# Altium PCB Intelligent_Agriculture.PcbDoc (part 2 of 5)
Units mm, origin at the board's own origin, x right, y up, seen from the top; angles counter-clockwise.
Board outline 99.69 x 99.69 mm, 2 copper layers (Top Layer, Bottom Layer); 90 components, 60 nets, 339 pads, 86 vias.
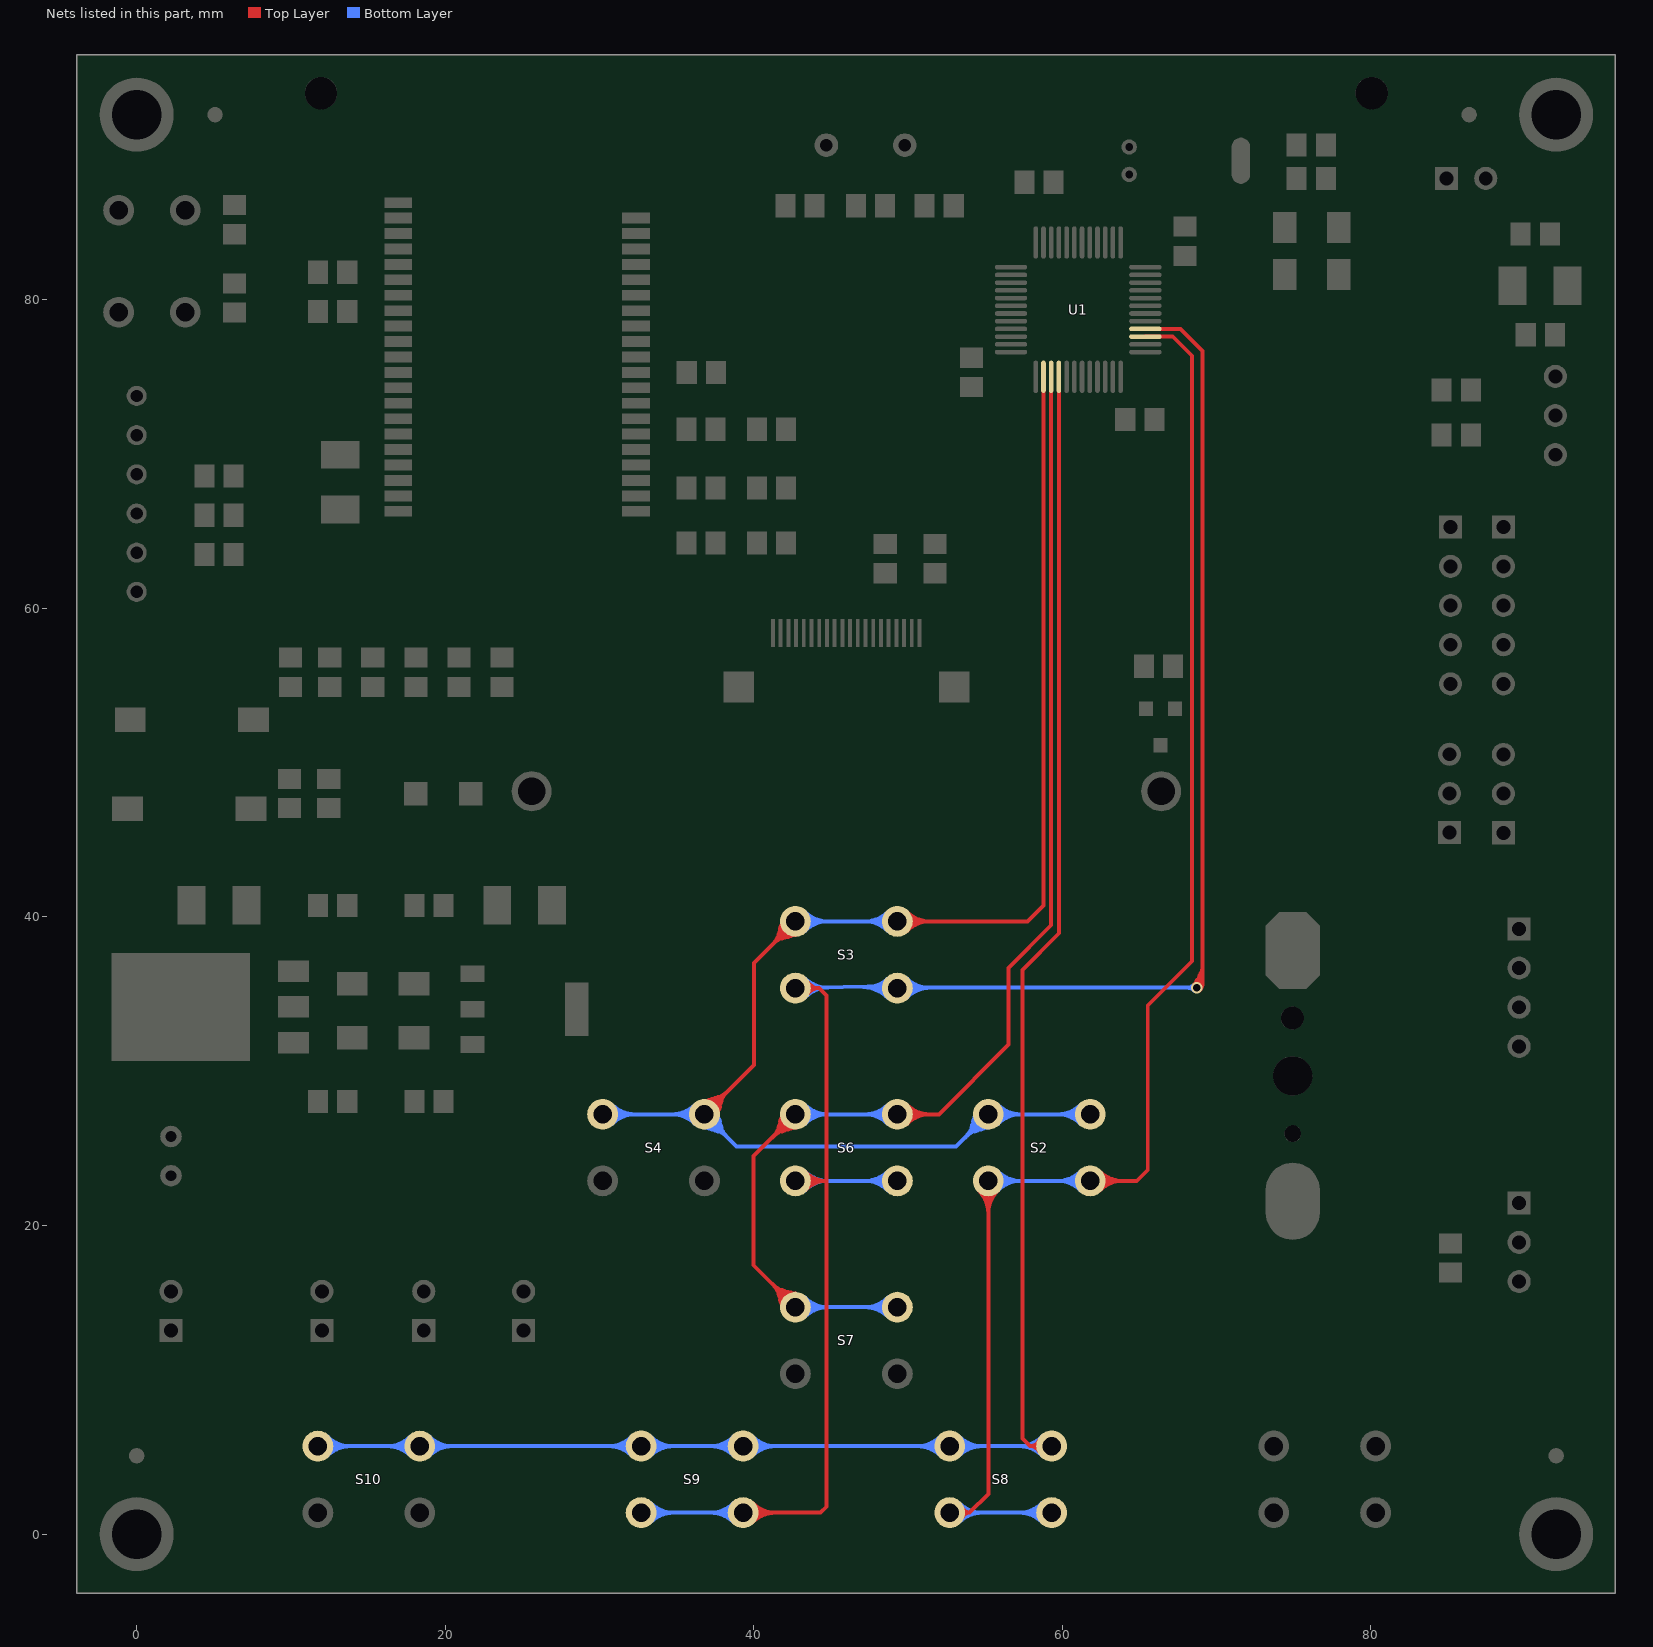
[diagram p2: the nets of this part, all layers, seen from the top]

## Via types
v1: diameter 0.762, hole 0.508, Top Layer to Bottom Layer, tented both sides, 82 vias
v2: diameter 4.8, hole 3.2, Top Layer to Bottom Layer, tented both sides, 4 vias

## Nets (pads, with @x,y where several pads share a name; then routed paths per layer and width w, separated by ;. In a path a pad name is that pad's centre, name@x,y a point inside that pad or via, vN(x,y) a via of type N, cw(c..) or ccw(c..) an arc to the next point about the centre after c; other vN are vias at no path point) (continued)
KEY_I1: S2.1 S2.4 S3.1 S3.4 S4.1 S4.4 U1.26 | length 368.8
  Top Layer w0.254: S4.1@36.802,27.21 40.005,30.413 40.005,37.017 S3.4@42.698,39.71 ; S3.1@49.302,39.71 57.744,39.71 58.774,40.74 U1.26@58.774,75.009 ; S4.1@36.413,27.29 cw(c37.593,27.048) 37.281,28.211 ; S4.1@36.413,27.29 cw(c37.593,27.048) 37.281,28.211 ; S4.1@36.413,27.29 cw(c37.593,27.048) 37.281,28.211 ; S4.1@36.662,27.239 cw(c38.043,26.956) 37.678,28.318 ; S4.1@36.662,27.239 cw(c38.043,26.956) 37.678,28.318 ; S4.1@36.662,27.239 cw(c38.043,26.956) 37.678,28.318 ; S4.1@36.799,27.321 ccw(c36.776,28.199) 37.625,27.972 ; S4.1@36.799,27.321 ccw(c36.776,28.199) 37.625,27.972 ; S4.1@36.799,27.321 ccw(c36.776,28.199) 37.625,27.972 ; S4.1@36.802,27.829 ccw(c36.802,29.323) 37.859,28.267 ; S4.1@36.802,27.829 ccw(c36.802,29.323) 37.859,28.267 ; S4.1@36.802,27.829 ccw(c36.802,29.323) 37.859,28.267 ; S4.1@36.802,28.083 ccw(c36.802,30.191) 38.292,28.7 ; S4.1@36.802,28.083 ccw(c36.802,30.191) 38.292,28.7 ; S4.1@36.802,28.083 ccw(c36.802,30.191) 38.292,28.7 ; S4.1@36.831,27.07 ccw(c36.548,28.451) 37.91,28.086 ; S4.1@36.831,27.07 ccw(c36.548,28.451) 37.91,28.086 ; S4.1@36.831,27.07 ccw(c36.548,28.451) 37.91,28.086 ; S4.1@36.882,26.821 ccw(c36.64,28.001) 37.803,27.689 ; S4.1@36.882,26.821 ccw(c36.64,28.001) 37.803,27.689 ; S4.1@36.882,26.821 ccw(c36.64,28.001) 37.803,27.689 ; S4.1@36.913,27.207 cw(c37.791,27.184) 37.564,28.033 ; S4.1@36.913,27.207 cw(c37.791,27.184) 37.564,28.033 ; S4.1@36.913,27.207 cw(c37.791,27.184) 37.564,28.033 ; S4.1@37.421,27.21 cw(c38.915,27.21) 37.859,28.267 ; S4.1@37.421,27.21 cw(c38.915,27.21) 37.859,28.267 ; S4.1@37.421,27.21 cw(c38.915,27.21) 37.859,28.267 ; S4.1@37.675,27.21 cw(c39.783,27.21) 38.292,28.7 ; S4.1@37.675,27.21 cw(c39.783,27.21) 38.292,28.7 ; S4.1@37.675,27.21 cw(c39.783,27.21) 38.292,28.7 ; 41.208,38.22 ccw(c39.717,39.71) S3.4@41.825,39.71 ; 41.208,38.22 cw(c42.698,36.729) S3.4@42.698,38.837 ; 41.208,38.22 ccw(c39.717,39.71) S3.4@41.825,39.71 ; 41.208,38.22 cw(c42.698,36.729) S3.4@42.698,38.837 ; 41.208,38.22 ccw(c39.717,39.71) S3.4@41.825,39.71 ; 41.208,38.22 cw(c42.698,36.729) S3.4@42.698,38.837 ; 41.59,38.834 cw(c42.952,38.469) S3.4@42.669,39.85 ; 41.59,38.834 cw(c42.952,38.469) S3.4@42.669,39.85 ; 41.59,38.834 cw(c42.952,38.469) S3.4@42.669,39.85 ; 41.641,38.653 ccw(c40.585,39.71) S3.4@42.079,39.71 ; 41.641,38.653 cw(c42.698,37.597) S3.4@42.698,39.091 ; 41.641,38.653 ccw(c40.585,39.71) S3.4@42.079,39.71 ; 41.641,38.653 cw(c42.698,37.597) S3.4@42.698,39.091 ; 41.641,38.653 ccw(c40.585,39.71) S3.4@42.079,39.71 ; 41.641,38.653 cw(c42.698,37.597) S3.4@42.698,39.091 ; 41.697,39.231 cw(c42.86,38.919) S3.4@42.618,40.099 ; 41.697,39.231 cw(c42.86,38.919) S3.4@42.618,40.099 ; 41.697,39.231 cw(c42.86,38.919) S3.4@42.618,40.099 ; 41.822,38.602 ccw(c41.457,39.964) S3.4@42.838,39.681 ; 41.822,38.602 ccw(c41.457,39.964) S3.4@42.838,39.681 ; 41.822,38.602 ccw(c41.457,39.964) S3.4@42.838,39.681 ; 41.875,38.948 cw(c42.724,38.721) S3.4@42.701,39.599 ; 41.875,38.948 cw(c42.724,38.721) S3.4@42.701,39.599 ; 41.875,38.948 cw(c42.724,38.721) S3.4@42.701,39.599 ; 41.936,38.887 ccw(c41.709,39.736) S3.4@42.587,39.713 ; 41.936,38.887 ccw(c41.709,39.736) S3.4@42.587,39.713 ; 41.936,38.887 ccw(c41.709,39.736) S3.4@42.587,39.713 ; 42.219,38.709 ccw(c41.907,39.872) S3.4@43.087,39.63 ; 42.219,38.709 ccw(c41.907,39.872) S3.4@43.087,39.63 ; 42.219,38.709 ccw(c41.907,39.872) S3.4@43.087,39.63 ; S3.1@49.74,39.272 cw(c50.796,38.216) 50.796,39.71 ; S3.1@49.74,39.272 cw(c50.796,38.216) 50.796,39.71 ; S3.1@49.74,39.272 cw(c50.796,38.216) 50.796,39.71 ; S3.1@49.74,40.148 ccw(c50.796,41.204) 50.796,39.71 ; S3.1@49.74,40.148 ccw(c50.796,41.204) 50.796,39.71 ; S3.1@49.74,40.148 ccw(c50.796,41.204) 50.796,39.71 ; S3.1@49.919,39.093 cw(c51.41,37.602) 51.41,39.71 ; S3.1@49.919,39.093 cw(c51.41,37.602) 51.41,39.71 ; S3.1@49.919,39.093 cw(c51.41,37.602) 51.41,39.71 ; S3.1@49.919,40.327 ccw(c51.41,41.818) 51.41,39.71 ; S3.1@49.919,40.327 ccw(c51.41,41.818) 51.41,39.71 ; S3.1@49.919,40.327 ccw(c51.41,41.818) 51.41,39.71
  Bottom Layer w0.254: S4.4@30.198,27.21 S4.1@36.802,27.21 38.883,25.129 53.117,25.129 S2.4@55.198,27.21 S2.1@61.802,27.21 ; S3.4@42.698,39.71 S3.1@49.302,39.71 ; S4.4@30.636,26.772 cw(c31.692,25.716) 31.692,27.21 ; S4.4@30.636,26.772 cw(c31.692,25.716) 31.692,27.21 ; S4.4@30.636,26.772 cw(c31.692,25.716) 31.692,27.21 ; S4.4@30.636,27.648 ccw(c31.692,28.704) 31.692,27.21 ; S4.4@30.636,27.648 ccw(c31.692,28.704) 31.692,27.21 ; S4.4@30.636,27.648 ccw(c31.692,28.704) 31.692,27.21 ; S4.4@30.815,26.593 cw(c32.306,25.102) 32.306,27.21 ; S4.4@30.815,26.593 cw(c32.306,25.102) 32.306,27.21 ; S4.4@30.815,26.593 cw(c32.306,25.102) 32.306,27.21 ; S4.4@30.815,27.827 ccw(c32.306,29.318) 32.306,27.21 ; S4.4@30.815,27.827 ccw(c32.306,29.318) 32.306,27.21 ; S4.4@30.815,27.827 ccw(c32.306,29.318) 32.306,27.21 ; 34.694,27.21 ccw(c34.694,29.318) S4.1@36.185,27.827 ; 34.694,27.21 cw(c34.694,25.102) S4.1@36.185,26.593 ; 34.694,27.21 ccw(c34.694,29.318) S4.1@36.185,27.827 ; 34.694,27.21 cw(c34.694,25.102) S4.1@36.185,26.593 ; 34.694,27.21 ccw(c34.694,29.318) S4.1@36.185,27.827 ; 34.694,27.21 cw(c34.694,25.102) S4.1@36.185,26.593 ; 35.308,27.21 ccw(c35.308,28.704) S4.1@36.364,27.648 ; 35.308,27.21 cw(c35.308,25.716) S4.1@36.364,26.772 ; 35.308,27.21 ccw(c35.308,28.704) S4.1@36.364,27.648 ; 35.308,27.21 cw(c35.308,25.716) S4.1@36.364,26.772 ; 35.308,27.21 ccw(c35.308,28.704) S4.1@36.364,27.648 ; 35.308,27.21 cw(c35.308,25.716) S4.1@36.364,26.772 ; S4.1@36.413,27.13 ccw(c37.593,27.372) 37.281,26.209 ; S4.1@36.413,27.13 ccw(c37.593,27.372) 37.281,26.209 ; S4.1@36.413,27.13 ccw(c37.593,27.372) 37.281,26.209 ; S4.1@36.662,27.181 ccw(c38.043,27.464) 37.678,26.102 ; S4.1@36.662,27.181 ccw(c38.043,27.464) 37.678,26.102 ; S4.1@36.662,27.181 ccw(c38.043,27.464) 37.678,26.102 ; S4.1@36.802,26.337 cw(c36.802,24.229) 38.292,25.72 ; S4.1@36.802,26.337 cw(c36.802,24.229) 38.292,25.72 ; S4.1@36.802,26.337 cw(c36.802,24.229) 38.292,25.72 ; S4.1@36.802,26.591 cw(c36.802,25.097) 37.859,26.153 ; S4.1@36.802,26.591 cw(c36.802,25.097) 37.859,26.153 ; S4.1@36.802,26.591 cw(c36.802,25.097) 37.859,26.153 ; S4.1@36.831,27.35 cw(c36.548,25.969) 37.91,26.334 ; S4.1@36.831,27.35 cw(c36.548,25.969) 37.91,26.334 ; S4.1@36.831,27.35 cw(c36.548,25.969) 37.91,26.334 ; S4.1@36.882,27.599 cw(c36.64,26.419) 37.803,26.731 ; S4.1@36.882,27.599 cw(c36.64,26.419) 37.803,26.731 ; S4.1@36.882,27.599 cw(c36.64,26.419) 37.803,26.731 ; S4.1@37.421,27.21 ccw(c38.915,27.21) 37.859,26.153 ; S4.1@37.421,27.21 ccw(c38.915,27.21) 37.859,26.153 ; S4.1@37.421,27.21 ccw(c38.915,27.21) 37.859,26.153 ; S4.1@37.675,27.21 ccw(c39.783,27.21) 38.292,25.72 ; S4.1@37.675,27.21 ccw(c39.783,27.21) 38.292,25.72 ; S4.1@37.675,27.21 ccw(c39.783,27.21) 38.292,25.72 ; S3.4@43.136,39.272 cw(c44.192,38.216) 44.192,39.71 ; S3.4@43.136,39.272 cw(c44.192,38.216) 44.192,39.71 ; S3.4@43.136,39.272 cw(c44.192,38.216) 44.192,39.71 ; S3.4@43.136,40.148 ccw(c44.192,41.204) 44.192,39.71 ; S3.4@43.136,40.148 ccw(c44.192,41.204) 44.192,39.71 ; S3.4@43.136,40.148 ccw(c44.192,41.204) 44.192,39.71 ; S3.4@43.315,39.093 cw(c44.806,37.602) 44.806,39.71 ; S3.4@43.315,39.093 cw(c44.806,37.602) 44.806,39.71 ; S3.4@43.315,39.093 cw(c44.806,37.602) 44.806,39.71 ; S3.4@43.315,40.327 ccw(c44.806,41.818) 44.806,39.71 ; S3.4@43.315,40.327 ccw(c44.806,41.818) 44.806,39.71 ; S3.4@43.315,40.327 ccw(c44.806,41.818) 44.806,39.71 ; 47.194,39.71 ccw(c47.194,41.818) S3.1@48.685,40.327 ; 47.194,39.71 cw(c47.194,37.602) S3.1@48.685,39.093 ; 47.194,39.71 ccw(c47.194,41.818) S3.1@48.685,40.327 ; 47.194,39.71 cw(c47.194,37.602) S3.1@48.685,39.093 ; 47.194,39.71 ccw(c47.194,41.818) S3.1@48.685,40.327 ; 47.194,39.71 cw(c47.194,37.602) S3.1@48.685,39.093 ; 47.808,39.71 ccw(c47.808,41.204) S3.1@48.864,40.148 ; 47.808,39.71 cw(c47.808,38.216) S3.1@48.864,39.272 ; 47.808,39.71 ccw(c47.808,41.204) S3.1@48.864,40.148 ; 47.808,39.71 cw(c47.808,38.216) S3.1@48.864,39.272 ; 47.808,39.71 ccw(c47.808,41.204) S3.1@48.864,40.148 ; 47.808,39.71 cw(c47.808,38.216) S3.1@48.864,39.272 ; 53.708,25.72 ccw(c52.217,27.21) S2.4@54.325,27.21 ; 53.708,25.72 cw(c55.198,24.229) S2.4@55.198,26.337 ; 53.708,25.72 ccw(c52.217,27.21) S2.4@54.325,27.21 ; 53.708,25.72 cw(c55.198,24.229) S2.4@55.198,26.337 ; 53.708,25.72 ccw(c52.217,27.21) S2.4@54.325,27.21 ; 53.708,25.72 cw(c55.198,24.229) S2.4@55.198,26.337 ; 54.09,26.334 cw(c55.452,25.969) S2.4@55.169,27.35 ; 54.09,26.334 cw(c55.452,25.969) S2.4@55.169,27.35 ; 54.09,26.334 cw(c55.452,25.969) S2.4@55.169,27.35 ; 54.141,26.153 ccw(c53.085,27.21) S2.4@54.579,27.21 ; 54.141,26.153 cw(c55.198,25.097) S2.4@55.198,26.591 ; 54.141,26.153 ccw(c53.085,27.21) S2.4@54.579,27.21 ; 54.141,26.153 cw(c55.198,25.097) S2.4@55.198,26.591 ; 54.141,26.153 ccw(c53.085,27.21) S2.4@54.579,27.21 ; 54.141,26.153 cw(c55.198,25.097) S2.4@55.198,26.591 ; 54.197,26.731 cw(c55.36,26.419) S2.4@55.118,27.599 ; 54.197,26.731 cw(c55.36,26.419) S2.4@55.118,27.599 ; 54.197,26.731 cw(c55.36,26.419) S2.4@55.118,27.599 ; 54.322,26.102 ccw(c53.957,27.464) S2.4@55.338,27.181 ; 54.322,26.102 ccw(c53.957,27.464) S2.4@55.338,27.181 ; 54.322,26.102 ccw(c53.957,27.464) S2.4@55.338,27.181 ; 54.719,26.209 ccw(c54.407,27.372) S2.4@55.587,27.13 ; 54.719,26.209 ccw(c54.407,27.372) S2.4@55.587,27.13 ; 54.719,26.209 ccw(c54.407,27.372) S2.4@55.587,27.13 ; S2.4@55.636,26.772 cw(c56.692,25.716) 56.692,27.21 ; S2.4@55.636,26.772 cw(c56.692,25.716) 56.692,27.21 ; S2.4@55.636,26.772 cw(c56.692,25.716) 56.692,27.21 ; S2.4@55.636,27.648 ccw(c56.692,28.704) 56.692,27.21 ; S2.4@55.636,27.648 ccw(c56.692,28.704) 56.692,27.21 ; S2.4@55.636,27.648 ccw(c56.692,28.704) 56.692,27.21 ; S2.4@55.815,26.593 cw(c57.306,25.102) 57.306,27.21 ; S2.4@55.815,26.593 cw(c57.306,25.102) 57.306,27.21 ; S2.4@55.815,26.593 cw(c57.306,25.102) 57.306,27.21 ; S2.4@55.815,27.827 ccw(c57.306,29.318) 57.306,27.21 ; S2.4@55.815,27.827 ccw(c57.306,29.318) 57.306,27.21 ; S2.4@55.815,27.827 ccw(c57.306,29.318) 57.306,27.21 ; 59.694,27.21 ccw(c59.694,29.318) S2.1@61.185,27.827 ; 59.694,27.21 cw(c59.694,25.102) S2.1@61.185,26.593 ; 59.694,27.21 ccw(c59.694,29.318) S2.1@61.185,27.827 ; 59.694,27.21 cw(c59.694,25.102) S2.1@61.185,26.593 ; 59.694,27.21 ccw(c59.694,29.318) S2.1@61.185,27.827 ; 59.694,27.21 cw(c59.694,25.102) S2.1@61.185,26.593 ; 60.308,27.21 ccw(c60.308,28.704) S2.1@61.364,27.648 ; 60.308,27.21 cw(c60.308,25.716) S2.1@61.364,26.772 ; 60.308,27.21 ccw(c60.308,28.704) S2.1@61.364,27.648 ; 60.308,27.21 cw(c60.308,25.716) S2.1@61.364,26.772 ; 60.308,27.21 ccw(c60.308,28.704) S2.1@61.364,27.648 ; 60.308,27.21 cw(c60.308,25.716) S2.1@61.364,26.772
KEY_I2: S6.1 S6.4 S7.1 S7.4 U1.27 | length 248.5
  Top Layer w0.254: S7.4@42.698,14.71 39.982,17.426 39.982,24.494 S6.4@42.698,27.21 ; S6.1@49.302,27.21 51.992,27.21 56.515,31.733 56.515,36.703 59.274,39.462 U1.27@59.274,75.009 ; 41.208,16.2 ccw(c42.698,17.691) S7.4@42.698,15.583 ; 41.208,16.2 cw(c39.717,14.71) S7.4@41.825,14.71 ; 41.208,16.2 ccw(c42.698,17.691) S7.4@42.698,15.583 ; 41.208,16.2 cw(c39.717,14.71) S7.4@41.825,14.71 ; 41.208,16.2 ccw(c42.698,17.691) S7.4@42.698,15.583 ; 41.208,16.2 cw(c39.717,14.71) S7.4@41.825,14.71 ; 41.208,25.72 ccw(c39.717,27.21) S6.4@41.825,27.21 ; 41.208,25.72 cw(c42.698,24.229) S6.4@42.698,26.337 ; 41.208,25.72 ccw(c39.717,27.21) S6.4@41.825,27.21 ; 41.208,25.72 cw(c42.698,24.229) S6.4@42.698,26.337 ; 41.208,25.72 ccw(c39.717,27.21) S6.4@41.825,27.21 ; 41.208,25.72 cw(c42.698,24.229) S6.4@42.698,26.337 ; 41.59,15.586 ccw(c42.952,15.951) S7.4@42.669,14.57 ; 41.59,15.586 ccw(c42.952,15.951) S7.4@42.669,14.57 ; 41.59,15.586 ccw(c42.952,15.951) S7.4@42.669,14.57 ; 41.59,26.334 cw(c42.952,25.969) S6.4@42.669,27.35 ; 41.59,26.334 cw(c42.952,25.969) S6.4@42.669,27.35 ; 41.59,26.334 cw(c42.952,25.969) S6.4@42.669,27.35 ; 41.641,15.767 ccw(c42.698,16.823) S7.4@42.698,15.329 ; 41.641,15.767 cw(c40.585,14.71) S7.4@42.079,14.71 ; 41.641,15.767 ccw(c42.698,16.823) S7.4@42.698,15.329 ; 41.641,15.767 cw(c40.585,14.71) S7.4@42.079,14.71 ; 41.641,15.767 ccw(c42.698,16.823) S7.4@42.698,15.329 ; 41.641,15.767 cw(c40.585,14.71) S7.4@42.079,14.71 ; 41.641,26.153 ccw(c40.585,27.21) S6.4@42.079,27.21 ; 41.641,26.153 cw(c42.698,25.097) S6.4@42.698,26.591 ; 41.641,26.153 ccw(c40.585,27.21) S6.4@42.079,27.21 ; 41.641,26.153 cw(c42.698,25.097) S6.4@42.698,26.591 ; 41.641,26.153 ccw(c40.585,27.21) S6.4@42.079,27.21 ; 41.641,26.153 cw(c42.698,25.097) S6.4@42.698,26.591 ; 41.697,15.189 ccw(c42.86,15.501) S7.4@42.618,14.321 ; 41.697,15.189 ccw(c42.86,15.501) S7.4@42.618,14.321 ; 41.697,15.189 ccw(c42.86,15.501) S7.4@42.618,14.321 ; 41.697,26.731 cw(c42.86,26.419) S6.4@42.618,27.599 ; 41.697,26.731 cw(c42.86,26.419) S6.4@42.618,27.599 ; 41.697,26.731 cw(c42.86,26.419) S6.4@42.618,27.599 ; 41.822,15.818 cw(c41.457,14.456) S7.4@42.838,14.739 ; 41.822,15.818 cw(c41.457,14.456) S7.4@42.838,14.739 ; 41.822,15.818 cw(c41.457,14.456) S7.4@42.838,14.739 ; 41.822,26.102 ccw(c41.457,27.464) S6.4@42.838,27.181 ; 41.822,26.102 ccw(c41.457,27.464) S6.4@42.838,27.181 ; 41.822,26.102 ccw(c41.457,27.464) S6.4@42.838,27.181 ; 41.875,15.472 ccw(c42.724,15.699) S7.4@42.701,14.821 ; 41.875,15.472 ccw(c42.724,15.699) S7.4@42.701,14.821 ; 41.875,15.472 ccw(c42.724,15.699) S7.4@42.701,14.821 ; 41.875,26.448 cw(c42.724,26.221) S6.4@42.701,27.099 ; 41.875,26.448 cw(c42.724,26.221) S6.4@42.701,27.099 ; 41.875,26.448 cw(c42.724,26.221) S6.4@42.701,27.099 ; 41.936,15.533 cw(c41.709,14.684) S7.4@42.587,14.707 ; 41.936,15.533 cw(c41.709,14.684) S7.4@42.587,14.707 ; 41.936,15.533 cw(c41.709,14.684) S7.4@42.587,14.707 ; 41.936,26.387 ccw(c41.709,27.236) S6.4@42.587,27.213 ; 41.936,26.387 ccw(c41.709,27.236) S6.4@42.587,27.213 ; 41.936,26.387 ccw(c41.709,27.236) S6.4@42.587,27.213 ; 42.219,15.711 cw(c41.907,14.548) S7.4@43.087,14.79 ; 42.219,15.711 cw(c41.907,14.548) S7.4@43.087,14.79 ; 42.219,15.711 cw(c41.907,14.548) S7.4@43.087,14.79 ; 42.219,26.209 ccw(c41.907,27.372) S6.4@43.087,27.13 ; 42.219,26.209 ccw(c41.907,27.372) S6.4@43.087,27.13 ; 42.219,26.209 ccw(c41.907,27.372) S6.4@43.087,27.13 ; S6.1@49.74,26.772 cw(c50.796,25.716) 50.796,27.21 ; S6.1@49.74,26.772 cw(c50.796,25.716) 50.796,27.21 ; S6.1@49.74,26.772 cw(c50.796,25.716) 50.796,27.21 ; S6.1@49.74,27.648 ccw(c50.796,28.704) 50.796,27.21 ; S6.1@49.74,27.648 ccw(c50.796,28.704) 50.796,27.21 ; S6.1@49.74,27.648 ccw(c50.796,28.704) 50.796,27.21 ; S6.1@49.919,26.593 cw(c51.41,25.102) 51.41,27.21 ; S6.1@49.919,26.593 cw(c51.41,25.102) 51.41,27.21 ; S6.1@49.919,26.593 cw(c51.41,25.102) 51.41,27.21 ; S6.1@49.919,27.827 ccw(c51.41,29.318) 51.41,27.21 ; S6.1@49.919,27.827 ccw(c51.41,29.318) 51.41,27.21 ; S6.1@49.919,27.827 ccw(c51.41,29.318) 51.41,27.21
  Bottom Layer w0.254: S7.4@42.698,14.71 S7.1@49.302,14.71 ; S6.4@42.698,27.21 S6.1@49.302,27.21 ; S7.4@43.136,14.272 cw(c44.192,13.216) 44.192,14.71 ; S7.4@43.136,14.272 cw(c44.192,13.216) 44.192,14.71 ; S7.4@43.136,14.272 cw(c44.192,13.216) 44.192,14.71 ; S7.4@43.136,15.148 ccw(c44.192,16.204) 44.192,14.71 ; S7.4@43.136,15.148 ccw(c44.192,16.204) 44.192,14.71 ; S7.4@43.136,15.148 ccw(c44.192,16.204) 44.192,14.71 ; S6.4@43.136,26.772 cw(c44.192,25.716) 44.192,27.21 ; S6.4@43.136,26.772 cw(c44.192,25.716) 44.192,27.21 ; S6.4@43.136,26.772 cw(c44.192,25.716) 44.192,27.21 ; S6.4@43.136,27.648 ccw(c44.192,28.704) 44.192,27.21 ; S6.4@43.136,27.648 ccw(c44.192,28.704) 44.192,27.21 ; S6.4@43.136,27.648 ccw(c44.192,28.704) 44.192,27.21 ; S7.4@43.315,14.093 cw(c44.806,12.602) 44.806,14.71 ; S7.4@43.315,14.093 cw(c44.806,12.602) 44.806,14.71 ; S7.4@43.315,14.093 cw(c44.806,12.602) 44.806,14.71 ; S7.4@43.315,15.327 ccw(c44.806,16.818) 44.806,14.71 ; S7.4@43.315,15.327 ccw(c44.806,16.818) 44.806,14.71 ; S7.4@43.315,15.327 ccw(c44.806,16.818) 44.806,14.71 ; S6.4@43.315,26.593 cw(c44.806,25.102) 44.806,27.21 ; S6.4@43.315,26.593 cw(c44.806,25.102) 44.806,27.21 ; S6.4@43.315,26.593 cw(c44.806,25.102) 44.806,27.21 ; S6.4@43.315,27.827 ccw(c44.806,29.318) 44.806,27.21 ; S6.4@43.315,27.827 ccw(c44.806,29.318) 44.806,27.21 ; S6.4@43.315,27.827 ccw(c44.806,29.318) 44.806,27.21 ; 47.194,14.71 ccw(c47.194,16.818) S7.1@48.685,15.327 ; 47.194,14.71 cw(c47.194,12.602) S7.1@48.685,14.093 ; 47.194,14.71 ccw(c47.194,16.818) S7.1@48.685,15.327 ; 47.194,14.71 cw(c47.194,12.602) S7.1@48.685,14.093 ; 47.194,14.71 ccw(c47.194,16.818) S7.1@48.685,15.327 ; 47.194,14.71 cw(c47.194,12.602) S7.1@48.685,14.093 ; 47.194,27.21 ccw(c47.194,29.318) S6.1@48.685,27.827 ; 47.194,27.21 cw(c47.194,25.102) S6.1@48.685,26.593 ; 47.194,27.21 ccw(c47.194,29.318) S6.1@48.685,27.827 ; 47.194,27.21 cw(c47.194,25.102) S6.1@48.685,26.593 ; 47.194,27.21 ccw(c47.194,29.318) S6.1@48.685,27.827 ; 47.194,27.21 cw(c47.194,25.102) S6.1@48.685,26.593 ; 47.808,14.71 ccw(c47.808,16.204) S7.1@48.864,15.148 ; 47.808,14.71 cw(c47.808,13.216) S7.1@48.864,14.272 ; 47.808,14.71 ccw(c47.808,16.204) S7.1@48.864,15.148 ; 47.808,14.71 cw(c47.808,13.216) S7.1@48.864,14.272 ; 47.808,14.71 ccw(c47.808,16.204) S7.1@48.864,15.148 ; 47.808,14.71 cw(c47.808,13.216) S7.1@48.864,14.272 ; 47.808,27.21 ccw(c47.808,28.704) S6.1@48.864,27.648 ; 47.808,27.21 cw(c47.808,25.716) S6.1@48.864,26.772 ; 47.808,27.21 ccw(c47.808,28.704) S6.1@48.864,27.648 ; 47.808,27.21 cw(c47.808,25.716) S6.1@48.864,26.772 ; 47.808,27.21 ccw(c47.808,28.704) S6.1@48.864,27.648 ; 47.808,27.21 cw(c47.808,25.716) S6.1@48.864,26.772
KEY_I3: S8.1 S8.4 S9.1 S9.4 S10.1 S10.4 U1.28 | length 293.7
  Top Layer w0.254: S8.1@59.295,5.703 57.907,5.703 ; U1.28@59.774,75.009 59.774,38.946 57.404,36.576 57.404,6.206 57.907,5.703 ; 57.907,5.703 ccw(c57.907,6.376) S8.1@58.514,6.086 ; 57.907,5.703 cw(c57.907,5.02) S8.1@58.52,5.323 ; 57.907,5.703 ccw(c57.907,6.376) S8.1@58.514,6.086 ; 57.907,5.703 cw(c57.907,5.02) S8.1@58.52,5.323 ; 57.907,5.703 ccw(c57.907,6.376) S8.1@58.514,6.086 ; 57.907,5.703 cw(c57.907,5.02) S8.1@58.52,5.323
  Bottom Layer w0.254: S10.4@11.748,5.703 S10.1@18.352,5.703 59.295,5.703 S8.1@59.302,5.71 ; S10.4@12.186,5.265 cw(c13.242,4.209) 13.242,5.703 ; S10.4@12.186,5.265 cw(c13.242,4.209) 13.242,5.703 ; S10.4@12.186,5.265 cw(c13.242,4.209) 13.242,5.703 ; S10.4@12.186,6.141 ccw(c13.242,7.197) 13.242,5.703 ; S10.4@12.186,6.141 ccw(c13.242,7.197) 13.242,5.703 ; S10.4@12.186,6.141 ccw(c13.242,7.197) 13.242,5.703 ; S10.4@12.365,5.086 cw(c13.856,3.595) 13.856,5.703 ; S10.4@12.365,5.086 cw(c13.856,3.595) 13.856,5.703 ; S10.4@12.365,5.086 cw(c13.856,3.595) 13.856,5.703 ; S10.4@12.365,6.32 ccw(c13.856,7.811) 13.856,5.703 ; S10.4@12.365,6.32 ccw(c13.856,7.811) 13.856,5.703 ; S10.4@12.365,6.32 ccw(c13.856,7.811) 13.856,5.703 ; 16.244,5.703 ccw(c16.244,7.811) S10.1@17.735,6.32 ; 16.244,5.703 cw(c16.244,3.595) S10.1@17.735,5.086 ; 16.244,5.703 ccw(c16.244,7.811) S10.1@17.735,6.32 ; 16.244,5.703 cw(c16.244,3.595) S10.1@17.735,5.086 ; 16.244,5.703 ccw(c16.244,7.811) S10.1@17.735,6.32 ; 16.244,5.703 cw(c16.244,3.595) S10.1@17.735,5.086 ; 16.858,5.703 ccw(c16.858,7.197) S10.1@17.914,6.141 ; 16.858,5.703 cw(c16.858,4.209) S10.1@17.914,5.265 ; 16.858,5.703 ccw(c16.858,7.197) S10.1@17.914,6.141 ; 16.858,5.703 cw(c16.858,4.209) S10.1@17.914,5.265 ; 16.858,5.703 ccw(c16.858,7.197) S10.1@17.914,6.141 ; 16.858,5.703 cw(c16.858,4.209) S10.1@17.914,5.265 ; S10.1@18.79,5.265 cw(c19.846,4.209) 19.846,5.703 ; S10.1@18.79,5.265 cw(c19.846,4.209) 19.846,5.703 ; S10.1@18.79,5.265 cw(c19.846,4.209) 19.846,5.703 ; S10.1@18.79,6.141 ccw(c19.846,7.197) 19.846,5.703 ; S10.1@18.79,6.141 ccw(c19.846,7.197) 19.846,5.703 ; S10.1@18.79,6.141 ccw(c19.846,7.197) 19.846,5.703 ; S10.1@18.969,5.086 cw(c20.46,3.595) 20.46,5.703 ; S10.1@18.969,5.086 cw(c20.46,3.595) 20.46,5.703 ; S10.1@18.969,5.086 cw(c20.46,3.595) 20.46,5.703 ; S10.1@18.969,6.32 ccw(c20.46,7.811) 20.46,5.703 ; S10.1@18.969,6.32 ccw(c20.46,7.811) 20.46,5.703 ; S10.1@18.969,6.32 ccw(c20.46,7.811) 20.46,5.703 ; 30.573,5.703 ccw(c30.573,7.835) S9.4@32.081,6.327 ; 30.573,5.703 ccw(c30.573,7.835) S9.4@32.081,6.327 ; 30.573,5.703 ccw(c30.573,7.835) S9.4@32.081,6.327 ; 30.607,5.703 cw(c30.607,3.619) S9.4@32.081,5.093 ; 30.607,5.703 cw(c30.607,3.619) S9.4@32.081,5.093 ; 30.607,5.703 cw(c30.607,3.619) S9.4@32.081,5.093 ; 31.187,5.703 ccw(c31.187,7.221) S9.4@32.26,6.148 ; 31.187,5.703 ccw(c31.187,7.221) S9.4@32.26,6.148 ; 31.187,5.703 ccw(c31.187,7.221) S9.4@32.26,6.148 ; 31.221,5.703 cw(c31.221,4.233) S9.4@32.26,5.272 ; 31.221,5.703 cw(c31.221,4.233) S9.4@32.26,5.272 ; 31.221,5.703 cw(c31.221,4.233) S9.4@32.26,5.272 ; S9.4@33.136,5.272 cw(c34.176,4.233) 34.176,5.703 ; S9.4@33.136,5.272 cw(c34.176,4.233) 34.176,5.703 ; S9.4@33.136,5.272 cw(c34.176,4.233) 34.176,5.703 ; S9.4@33.136,6.148 ccw(c34.209,7.221) 34.209,5.703 ; S9.4@33.136,6.148 ccw(c34.209,7.221) 34.209,5.703 ; S9.4@33.136,6.148 ccw(c34.209,7.221) 34.209,5.703 ; S9.4@33.315,5.093 cw(c34.789,3.619) 34.789,5.703 ; S9.4@33.315,5.093 cw(c34.789,3.619) 34.789,5.703 ; S9.4@33.315,5.093 cw(c34.789,3.619) 34.789,5.703 ; S9.4@33.315,6.327 ccw(c34.823,7.835) 34.823,5.703 ; S9.4@33.315,6.327 ccw(c34.823,7.835) 34.823,5.703 ; S9.4@33.315,6.327 ccw(c34.823,7.835) 34.823,5.703 ; 37.177,5.703 ccw(c37.177,7.835) S9.1@38.685,6.327 ; 37.177,5.703 ccw(c37.177,7.835) S9.1@38.685,6.327 ; 37.177,5.703 ccw(c37.177,7.835) S9.1@38.685,6.327 ; 37.211,5.703 cw(c37.211,3.619) S9.1@38.685,5.093 ; 37.211,5.703 cw(c37.211,3.619) S9.1@38.685,5.093 ; 37.211,5.703 cw(c37.211,3.619) S9.1@38.685,5.093 ; 37.791,5.703 ccw(c37.791,7.221) S9.1@38.864,6.148 ; 37.791,5.703 ccw(c37.791,7.221) S9.1@38.864,6.148 ; 37.791,5.703 ccw(c37.791,7.221) S9.1@38.864,6.148 ; 37.825,5.703 cw(c37.825,4.233) S9.1@38.864,5.272 ; 37.825,5.703 cw(c37.825,4.233) S9.1@38.864,5.272 ; 37.825,5.703 cw(c37.825,4.233) S9.1@38.864,5.272 ; S9.1@39.74,5.272 cw(c40.78,4.233) 40.78,5.703 ; S9.1@39.74,5.272 cw(c40.78,4.233) 40.78,5.703 ; S9.1@39.74,5.272 cw(c40.78,4.233) 40.78,5.703 ; S9.1@39.74,6.148 ccw(c40.813,7.221) 40.813,5.703 ; S9.1@39.74,6.148 ccw(c40.813,7.221) 40.813,5.703 ; S9.1@39.74,6.148 ccw(c40.813,7.221) 40.813,5.703 ; S9.1@39.919,5.093 cw(c41.393,3.619) 41.393,5.703 ; S9.1@39.919,5.093 cw(c41.393,3.619) 41.393,5.703 ; S9.1@39.919,5.093 cw(c41.393,3.619) 41.393,5.703 ; S9.1@39.919,6.327 ccw(c41.427,7.835) 41.427,5.703 ; S9.1@39.919,6.327 ccw(c41.427,7.835) 41.427,5.703 ; S9.1@39.919,6.327 ccw(c41.427,7.835) 41.427,5.703 ; 50.573,5.703 ccw(c50.573,7.835) S8.4@52.081,6.327 ; 50.573,5.703 ccw(c50.573,7.835) S8.4@52.081,6.327 ; 50.573,5.703 ccw(c50.573,7.835) S8.4@52.081,6.327 ; 50.607,5.703 cw(c50.607,3.619) S8.4@52.081,5.093 ; 50.607,5.703 cw(c50.607,3.619) S8.4@52.081,5.093 ; 50.607,5.703 cw(c50.607,3.619) S8.4@52.081,5.093 ; 51.187,5.703 ccw(c51.187,7.221) S8.4@52.26,6.148 ; 51.187,5.703 ccw(c51.187,7.221) S8.4@52.26,6.148 ; 51.187,5.703 ccw(c51.187,7.221) S8.4@52.26,6.148 ; 51.221,5.703 cw(c51.221,4.233) S8.4@52.26,5.272 ; 51.221,5.703 cw(c51.221,4.233) S8.4@52.26,5.272 ; 51.221,5.703 cw(c51.221,4.233) S8.4@52.26,5.272 ; S8.4@53.136,5.272 cw(c54.176,4.233) 54.176,5.703 ; S8.4@53.136,5.272 cw(c54.176,4.233) 54.176,5.703 ; S8.4@53.136,5.272 cw(c54.176,4.233) 54.176,5.703 ; S8.4@53.136,6.148 ccw(c54.209,7.221) 54.209,5.703 ; S8.4@53.136,6.148 ccw(c54.209,7.221) 54.209,5.703 ; S8.4@53.136,6.148 ccw(c54.209,7.221) 54.209,5.703 ; S8.4@53.315,5.093 cw(c54.789,3.619) 54.789,5.703 ; S8.4@53.315,5.093 cw(c54.789,3.619) 54.789,5.703 ; S8.4@53.315,5.093 cw(c54.789,3.619) 54.789,5.703 ; S8.4@53.315,6.327 ccw(c54.823,7.835) 54.823,5.703 ; S8.4@53.315,6.327 ccw(c54.823,7.835) 54.823,5.703 ; S8.4@53.315,6.327 ccw(c54.823,7.835) 54.823,5.703 ; 57.177,5.703 ccw(c57.177,7.835) S8.1@58.685,6.327 ; 57.177,5.703 ccw(c57.177,7.835) S8.1@58.685,6.327 ; 57.177,5.703 ccw(c57.177,7.835) S8.1@58.685,6.327 ; 57.211,5.703 cw(c57.211,3.619) S8.1@58.685,5.093 ; 57.211,5.703 cw(c57.211,3.619) S8.1@58.685,5.093 ; 57.211,5.703 cw(c57.211,3.619) S8.1@58.685,5.093 ; 57.791,5.703 ccw(c57.791,7.221) S8.1@58.864,6.148 ; 57.791,5.703 ccw(c57.791,7.221) S8.1@58.864,6.148 ; 57.791,5.703 ccw(c57.791,7.221) S8.1@58.864,6.148 ; 57.825,5.703 cw(c57.825,4.233) S8.1@58.864,5.272 ; 57.825,5.703 cw(c57.825,4.233) S8.1@58.864,5.272 ; 57.825,5.703 cw(c57.825,4.233) S8.1@58.864,5.272
KEY_O1: S2.2 S2.3 S8.2 S8.3 U1.39 | length 203.5
  Top Layer w0.254: S8.3@52.698,1.392 53.987,1.392 ; S2.3@55.198,22.892 55.198,2.603 53.987,1.392 ; S2.2@61.802,22.892 64.819,22.892 65.532,23.605 65.532,34.273 68.39,37.131 68.39,76.374 67.15,77.613 U1.39@65.378,77.613 ; S8.3@53.509,1.068 cw(c53.987,0.877) 53.987,1.392 ; S8.3@53.509,1.068 cw(c53.987,0.877) 53.987,1.392 ; S8.3@53.509,1.068 cw(c53.987,0.877) 53.987,1.392 ; S8.3@53.509,1.716 ccw(c53.987,1.907) 53.987,1.392 ; S8.3@53.509,1.716 ccw(c53.987,1.907) 53.987,1.392 ; S8.3@53.509,1.716 ccw(c53.987,1.907) 53.987,1.392 ; S2.3@54.581,22.275 cw(c53.09,20.784) 55.198,20.784 ; S2.3@54.581,22.275 cw(c53.09,20.784) 55.198,20.784 ; S2.3@54.581,22.275 cw(c53.09,20.784) 55.198,20.784 ; S2.3@54.76,22.454 cw(c53.704,21.398) 55.198,21.398 ; S2.3@54.76,22.454 cw(c53.704,21.398) 55.198,21.398 ; S2.3@54.76,22.454 cw(c53.704,21.398) 55.198,21.398 ; 55.198,20.784 cw(c57.306,20.784) S2.3@55.815,22.275 ; 55.198,20.784 cw(c57.306,20.784) S2.3@55.815,22.275 ; 55.198,20.784 cw(c57.306,20.784) S2.3@55.815,22.275 ; 55.198,21.398 cw(c56.692,21.398) S2.3@55.636,22.454 ; 55.198,21.398 cw(c56.692,21.398) S2.3@55.636,22.454 ; 55.198,21.398 cw(c56.692,21.398) S2.3@55.636,22.454 ; S2.2@62.24,22.454 cw(c63.296,21.398) 63.296,22.892 ; S2.2@62.24,22.454 cw(c63.296,21.398) 63.296,22.892 ; S2.2@62.24,22.454 cw(c63.296,21.398) 63.296,22.892 ; S2.2@62.24,23.33 ccw(c63.296,24.386) 63.296,22.892 ; S2.2@62.24,23.33 ccw(c63.296,24.386) 63.296,22.892 ; S2.2@62.24,23.33 ccw(c63.296,24.386) 63.296,22.892 ; S2.2@62.419,22.275 cw(c63.91,20.784) 63.91,22.892 ; S2.2@62.419,22.275 cw(c63.91,20.784) 63.91,22.892 ; S2.2@62.419,22.275 cw(c63.91,20.784) 63.91,22.892 ; S2.2@62.419,23.509 ccw(c63.91,25) 63.91,22.892 ; S2.2@62.419,23.509 ccw(c63.91,25) 63.91,22.892 ; S2.2@62.419,23.509 ccw(c63.91,25) 63.91,22.892
  Bottom Layer w0.254: S8.3@52.698,1.392 S8.2@59.302,1.392 ; S2.3@55.198,22.892 S2.2@61.802,22.892 ; S8.3@53.136,0.954 cw(c54.192,-0.102) 54.192,1.392 ; S8.3@53.136,0.954 cw(c54.192,-0.102) 54.192,1.392 ; S8.3@53.136,0.954 cw(c54.192,-0.102) 54.192,1.392 ; S8.3@53.136,1.83 ccw(c54.192,2.886) 54.192,1.392 ; S8.3@53.136,1.83 ccw(c54.192,2.886) 54.192,1.392 ; S8.3@53.136,1.83 ccw(c54.192,2.886) 54.192,1.392 ; S8.3@53.315,0.775 cw(c54.806,-0.716) 54.806,1.392 ; S8.3@53.315,0.775 cw(c54.806,-0.716) 54.806,1.392 ; S8.3@53.315,0.775 cw(c54.806,-0.716) 54.806,1.392 ; S8.3@53.315,2.009 ccw(c54.806,3.5) 54.806,1.392 ; S8.3@53.315,2.009 ccw(c54.806,3.5) 54.806,1.392 ; S8.3@53.315,2.009 ccw(c54.806,3.5) 54.806,1.392 ; S2.3@55.636,22.454 cw(c56.692,21.398) 56.692,22.892 ; S2.3@55.636,22.454 cw(c56.692,21.398) 56.692,22.892 ; S2.3@55.636,22.454 cw(c56.692,21.398) 56.692,22.892 ; S2.3@55.636,23.33 ccw(c56.692,24.386) 56.692,22.892 ; S2.3@55.636,23.33 ccw(c56.692,24.386) 56.692,22.892 ; S2.3@55.636,23.33 ccw(c56.692,24.386) 56.692,22.892 ; S2.3@55.815,22.275 cw(c57.306,20.784) 57.306,22.892 ; S2.3@55.815,22.275 cw(c57.306,20.784) 57.306,22.892 ; S2.3@55.815,22.275 cw(c57.306,20.784) 57.306,22.892 ; S2.3@55.815,23.509 ccw(c57.306,25) 57.306,22.892 ; S2.3@55.815,23.509 ccw(c57.306,25) 57.306,22.892 ; S2.3@55.815,23.509 ccw(c57.306,25) 57.306,22.892 ; 57.194,1.392 ccw(c57.194,3.5) S8.2@58.685,2.009 ; 57.194,1.392 cw(c57.194,-0.716) S8.2@58.685,0.775 ; 57.194,1.392 ccw(c57.194,3.5) S8.2@58.685,2.009 ; 57.194,1.392 cw(c57.194,-0.716) S8.2@58.685,0.775 ; 57.194,1.392 ccw(c57.194,3.5) S8.2@58.685,2.009 ; 57.194,1.392 cw(c57.194,-0.716) S8.2@58.685,0.775 ; 57.808,1.392 ccw(c57.808,2.886) S8.2@58.864,1.83 ; 57.808,1.392 cw(c57.808,-0.102) S8.2@58.864,0.954 ; 57.808,1.392 ccw(c57.808,2.886) S8.2@58.864,1.83 ; 57.808,1.392 cw(c57.808,-0.102) S8.2@58.864,0.954 ; 57.808,1.392 ccw(c57.808,2.886) S8.2@58.864,1.83 ; 57.808,1.392 cw(c57.808,-0.102) S8.2@58.864,0.954 ; 59.694,22.892 ccw(c59.694,25) S2.2@61.185,23.509 ; 59.694,22.892 cw(c59.694,20.784) S2.2@61.185,22.275 ; 59.694,22.892 ccw(c59.694,25) S2.2@61.185,23.509 ; 59.694,22.892 cw(c59.694,20.784) S2.2@61.185,22.275 ; 59.694,22.892 ccw(c59.694,25) S2.2@61.185,23.509 ; 59.694,22.892 cw(c59.694,20.784) S2.2@61.185,22.275 ; 60.308,22.892 ccw(c60.308,24.386) S2.2@61.364,23.33 ; 60.308,22.892 cw(c60.308,21.398) S2.2@61.364,22.454 ; 60.308,22.892 ccw(c60.308,24.386) S2.2@61.364,23.33 ; 60.308,22.892 cw(c60.308,21.398) S2.2@61.364,22.454 ; 60.308,22.892 ccw(c60.308,24.386) S2.2@61.364,23.33 ; 60.308,22.892 cw(c60.308,21.398) S2.2@61.364,22.454
KEY_O2: S3.2 S3.3 S6.2 S6.3 S9.2 S9.3 U1.40 | length 312.2
  Top Layer w0.254: S9.2@39.302,1.392 44.323,1.392 44.704,1.773 44.704,22.892 ; S6.3@42.698,22.892 44.704,22.892 ; S3.3@42.698,35.392 44.221,35.392 ; U1.40@65.378,78.113 67.666,78.113 69.088,76.691 69.088,35.67 ; v1@68.834,35.416 69.088,35.67 ; S9.2@39.74,0.954 cw(c40.796,-0.102) 40.796,1.392 ; S9.2@39.74,0.954 cw(c40.796,-0.102) 40.796,1.392 ; S9.2@39.74,0.954 cw(c40.796,-0.102) 40.796,1.392 ; S9.2@39.74,1.83 ccw(c40.796,2.886) 40.796,1.392 ; S9.2@39.74,1.83 ccw(c40.796,2.886) 40.796,1.392 ; S9.2@39.74,1.83 ccw(c40.796,2.886) 40.796,1.392 ; S9.2@39.919,0.775 cw(c41.41,-0.716) 41.41,1.392 ; S9.2@39.919,0.775 cw(c41.41,-0.716) 41.41,1.392 ; S9.2@39.919,0.775 cw(c41.41,-0.716) 41.41,1.392 ; S9.2@39.919,2.009 ccw(c41.41,3.5) 41.41,1.392 ; S9.2@39.919,2.009 ccw(c41.41,3.5) 41.41,1.392 ; S9.2@39.919,2.009 ccw(c41.41,3.5) 41.41,1.392 ; S6.3@43.151,22.47 cw(c44.12,21.568) 44.12,22.892 ; S6.3@43.151,22.47 cw(c44.12,21.568) 44.12,22.892 ; S6.3@43.151,22.47 cw(c44.12,21.568) 44.12,22.892 ; S6.3@43.151,23.314 ccw(c44.12,24.216) 44.12,22.892 ; S6.3@43.151,23.314 ccw(c44.12,24.216) 44.12,22.892 ; S6.3@43.151,23.314 ccw(c44.12,24.216) 44.12,22.892 ; S3.3@43.232,35.079 cw(c43.778,34.76) 43.778,35.392 ; S3.3@43.232,35.079 cw(c43.778,34.76) 43.778,35.392 ; S3.3@43.232,35.079 cw(c43.778,34.76) 43.778,35.392 ; S3.3@43.232,35.705 ccw(c43.778,36.024) 43.778,35.392 ; S3.3@43.232,35.705 ccw(c43.778,36.024) 43.778,35.392 ; S3.3@43.232,35.705 ccw(c43.778,36.024) 43.778,35.392 ; S6.3@43.337,22.297 cw(c44.704,21.024) 44.704,22.892 ; S6.3@43.337,22.297 cw(c44.704,21.024) 44.704,22.892 ; S6.3@43.337,22.297 cw(c44.704,21.024) 44.704,22.892 ; S6.3@43.337,23.487 ccw(c44.704,24.76) 44.704,22.892 ; S6.3@43.337,23.487 ccw(c44.704,24.76) 44.704,22.892 ; S6.3@43.337,23.487 ccw(c44.704,24.76) 44.704,22.892 ; S3.3@43.451,34.951 cw(c44.221,34.5) 44.221,35.392 ; S3.3@43.451,34.951 cw(c44.221,34.5) 44.221,35.392 ; S3.3@43.451,34.951 cw(c44.221,34.5) 44.221,35.392 ; S3.3@43.451,35.833 ccw(c44.221,36.284) 44.221,35.392 ; S3.3@43.451,35.833 ccw(c44.221,36.284) 44.221,35.392 ; S3.3@43.451,35.833 ccw(c44.221,36.284) 44.221,35.392 ; 44.221,35.392 44.704,34.909 44.704,22.892 ; v1@68.527,35.596 ccw(c67.174,36.949) 69.088,36.949 ; v1@68.527,35.596 ccw(c67.174,36.949) 69.088,36.949 ; v1@68.527,35.596 ccw(c67.174,36.949) 69.088,36.949 ; v1@68.641,35.661 ccw(c68.483,36.254) 69.014,35.947 ; v1@68.641,35.661 ccw(c68.483,36.254) 69.014,35.947 ; v1@68.641,35.661 ccw(c68.483,36.254) 69.014,35.947 ; v1(68.707,35.416) ccw(c67.787,36.336) 69.088,36.336 ; v1(68.707,35.416) cw(c69.182,35.661) 68.719,35.928 ; v1(68.707,35.416) ccw(c67.787,36.336) 69.088,36.336 ; v1(68.707,35.416) cw(c69.182,35.661) 68.719,35.928 ; v1(68.707,35.416) cw(c69.182,35.661) 68.719,35.928 ; v1(68.707,35.416) ccw(c67.787,36.336) 69.088,36.336 ; v1@68.834,35.636 ccw(c68.939,35.819) 69.088,35.67 ; v1@68.834,35.636 ccw(c68.939,35.819) 69.088,35.67 ; v1@68.834,35.636 ccw(c68.939,35.819) 69.088,35.67 ; v1@68.887,35.236 ccw(c68.4,35.723) 69.088,35.723 ; v1@68.887,35.236 ccw(c68.4,35.723) 69.088,35.723 ; v1@68.887,35.236 ccw(c68.4,35.723) 69.088,35.723 ; v1@68.933,35.532 cw(c69.674,35.914) 68.952,36.331 ; v1@68.933,35.532 cw(c69.674,35.914) 68.952,36.331 ; v1@68.933,35.532 cw(c69.674,35.914) 68.952,36.331 ; v1@68.952,35.482 cw(c69.545,35.64) 69.014,35.947 ; v1@68.952,35.482 cw(c69.545,35.64) 69.014,35.947 ; v1@68.952,35.482 cw(c69.545,35.64) 69.014,35.947 ; v1@68.961,35.416 cw(c69.268,35.416) 69.051,35.633 ; v1@68.961,35.416 cw(c69.268,35.416) 69.051,35.633 ; v1@68.961,35.416 cw(c69.268,35.416) 69.051,35.633
  Bottom Layer w0.254: S9.3@32.698,1.392 S9.2@39.302,1.392 ; S6.3@42.698,22.892 S6.2@49.302,22.892 ; S3.3@42.698,35.392 S3.2@48.921,35.519 ; S3.2@49.326,35.416 v1(68.707,35.416) ; S9.3@33.136,0.954 cw(c34.192,-0.102) 34.192,1.392 ; S9.3@33.136,0.954 cw(c34.192,-0.102) 34.192,1.392 ; S9.3@33.136,0.954 cw(c34.192,-0.102) 34.192,1.392 ; S9.3@33.136,1.83 ccw(c34.192,2.886) 34.192,1.392 ; S9.3@33.136,1.83 ccw(c34.192,2.886) 34.192,1.392 ; S9.3@33.136,1.83 ccw(c34.192,2.886) 34.192,1.392 ; S9.3@33.315,0.775 cw(c34.806,-0.716) 34.806,1.392 ; S9.3@33.315,0.775 cw(c34.806,-0.716) 34.806,1.392 ; S9.3@33.315,0.775 cw(c34.806,-0.716) 34.806,1.392 ; S9.3@33.315,2.009 ccw(c34.806,3.5) 34.806,1.392 ; S9.3@33.315,2.009 ccw(c34.806,3.5) 34.806,1.392 ; S9.3@33.315,2.009 ccw(c34.806,3.5) 34.806,1.392 ; 37.194,1.392 ccw(c37.194,3.5) S9.2@38.685,2.009 ; 37.194,1.392 cw(c37.194,-0.716) S9.2@38.685,0.775 ; 37.194,1.392 ccw(c37.194,3.5) S9.2@38.685,2.009 ; 37.194,1.392 cw(c37.194,-0.716) S9.2@38.685,0.775 ; 37.194,1.392 ccw(c37.194,3.5) S9.2@38.685,2.009 ; 37.194,1.392 cw(c37.194,-0.716) S9.2@38.685,0.775 ; 37.808,1.392 ccw(c37.808,2.886) S9.2@38.864,1.83 ; 37.808,1.392 cw(c37.808,-0.102) S9.2@38.864,0.954 ; 37.808,1.392 ccw(c37.808,2.886) S9.2@38.864,1.83 ; 37.808,1.392 cw(c37.808,-0.102) S9.2@38.864,0.954 ; 37.808,1.392 ccw(c37.808,2.886) S9.2@38.864,1.83 ; 37.808,1.392 cw(c37.808,-0.102) S9.2@38.864,0.954 ; S3.3@43.127,35.839 ccw(c44.162,36.917) 44.192,35.423 ; S3.3@43.127,35.839 ccw(c44.162,36.917) 44.192,35.423 ; S3.3@43.127,35.839 ccw(c44.162,36.917) 44.192,35.423 ; S6.3@43.136,22.454 cw(c44.192,21.398) 44.192,22.892 ; S6.3@43.136,22.454 cw(c44.192,21.398) 44.192,22.892 ; S6.3@43.136,22.454 cw(c44.192,21.398) 44.192,22.892 ; S6.3@43.136,23.33 ccw(c44.192,24.386) 44.192,22.892 ; S6.3@43.136,23.33 ccw(c44.192,24.386) 44.192,22.892 ; S6.3@43.136,23.33 ccw(c44.192,24.386) 44.192,22.892 ; S3.3@43.145,34.963 cw(c44.223,33.928) 44.192,35.423 ; S3.3@43.145,34.963 cw(c44.223,33.928) 44.192,35.423 ; S3.3@43.145,34.963 cw(c44.223,33.928) 44.192,35.423 ; S3.3@43.303,36.022 ccw(c44.762,37.542) 44.805,35.435 ; S3.3@43.303,36.022 ccw(c44.762,37.542) 44.805,35.435 ; S3.3@43.303,36.022 ccw(c44.762,37.542) 44.805,35.435 ; S6.3@43.315,22.275 cw(c44.806,20.784) 44.806,22.892 ; S6.3@43.315,22.275 cw(c44.806,20.784) 44.806,22.892 ; S6.3@43.315,22.275 cw(c44.806,20.784) 44.806,22.892 ; S6.3@43.315,23.509 ccw(c44.806,25) 44.806,22.892 ; S6.3@43.315,23.509 ccw(c44.806,25) 44.806,22.892 ; S6.3@43.315,23.509 ccw(c44.806,25) 44.806,22.892 ; S3.3@43.328,34.787 cw(c44.848,33.328) 44.805,35.435 ; S3.3@43.328,34.787 cw(c44.848,33.328) 44.805,35.435 ; S3.3@43.328,34.787 cw(c44.848,33.328) 44.805,35.435 ; 46.867,35.477 cw(c46.919,32.91) S3.2@48.697,34.762 ; 46.867,35.477 cw(c46.919,32.91) S3.2@48.697,34.762 ; 46.867,35.477 cw(c46.919,32.91) S3.2@48.697,34.762 ; 47.194,22.892 ccw(c47.194,25) S6.2@48.685,23.509 ; 47.194,22.892 cw(c47.194,20.784) S6.2@48.685,22.275 ; 47.194,22.892 ccw(c47.194,25) S6.2@48.685,23.509 ; 47.194,22.892 cw(c47.194,20.784) S6.2@48.685,22.275 ; 47.194,22.892 ccw(c47.194,25) S6.2@48.685,23.509 ; 47.194,22.892 cw(c47.194,20.784) S6.2@48.685,22.275 ; 47.48,35.49 cw(c47.52,33.536) S3.2@48.873,34.945 ; 47.48,35.49 cw(c47.52,33.536) S3.2@48.873,34.945 ; 47.48,35.49 cw(c47.52,33.536) S3.2@48.873,34.945 ; 47.517,35.49 ccw(c47.484,37.138) S3.2@48.672,35.997 ; 47.517,35.49 ccw(c47.484,37.138) S3.2@48.672,35.997 ; 47.517,35.49 ccw(c47.484,37.138) S3.2@48.672,35.997 ; 47.808,22.892 ccw(c47.808,24.386) S6.2@48.864,23.33 ; 47.808,22.892 cw(c47.808,21.398) S6.2@48.864,22.454 ; 47.808,22.892 ccw(c47.808,24.386) S6.2@48.864,23.33 ; 47.808,22.892 cw(c47.808,21.398) S6.2@48.864,22.454 ; 47.808,22.892 ccw(c47.808,24.386) S6.2@48.864,23.33 ; 47.808,22.892 cw(c47.808,21.398) S6.2@48.864,22.454 ; 48.093,35.502 cw(c48.12,34.161) S3.2@49.049,35.129 ; 48.093,35.502 cw(c48.12,34.161) S3.2@49.049,35.129 ; 48.093,35.502 cw(c48.12,34.161) S3.2@49.049,35.129 ; 48.13,35.503 ccw(c48.109,36.537) S3.2@48.855,35.821 ; 48.13,35.503 ccw(c48.109,36.537) S3.2@48.855,35.821 ; 48.13,35.503 ccw(c48.109,36.537) S3.2@48.855,35.821 ; S3.2@49.74,34.954 cw(c50.854,33.84) 50.854,35.416 ; S3.2@49.74,34.954 cw(c50.854,33.84) 50.854,35.416 ; S3.2@49.74,34.954 cw(c50.854,33.84) 50.854,35.416 ; S3.2@49.74,35.83 ccw(c50.738,36.828) 50.738,35.416 ; S3.2@49.74,35.83 ccw(c50.738,36.828) 50.738,35.416 ; S3.2@49.74,35.83 ccw(c50.738,36.828) 50.738,35.416 ; S3.2@49.919,34.775 cw(c51.468,33.226) 51.468,35.416 ; S3.2@49.919,34.775 cw(c51.468,33.226) 51.468,35.416 ; S3.2@49.919,34.775 cw(c51.468,33.226) 51.468,35.416 ; S3.2@49.919,36.009 ccw(c51.352,37.442) 51.352,35.416 ; S3.2@49.919,36.009 ccw(c51.352,37.442) 51.352,35.416 ; S3.2@49.919,36.009 ccw(c51.352,37.442) 51.352,35.416 ; 68.094,35.416 ccw(c68.094,36.029) v1@68.527,35.596 ; 68.094,35.416 cw(c68.094,34.803) v1@68.527,35.236 ; 68.094,35.416 ccw(c68.094,36.029) v1@68.527,35.596 ; 68.094,35.416 cw(c68.094,34.803) v1@68.527,35.236 ; 68.094,35.416 ccw(c68.094,36.029) v1@68.527,35.596 ; 68.094,35.416 cw(c68.094,34.803) v1@68.527,35.236